# Altium PCB MB1137.PcbDoc (part 3 of 4)
Units mm, origin at the board's own origin, x right, y up, seen from the top; angles counter-clockwise.
Board outline 70.13 x 133.47 mm, 6 copper layers (Top Layer, GND, Signal, PWR, GND (Mid2), Bottom Layer), stack 1.893 mm thick; 293 components, 281 nets, 1134 pads, 921 vias.
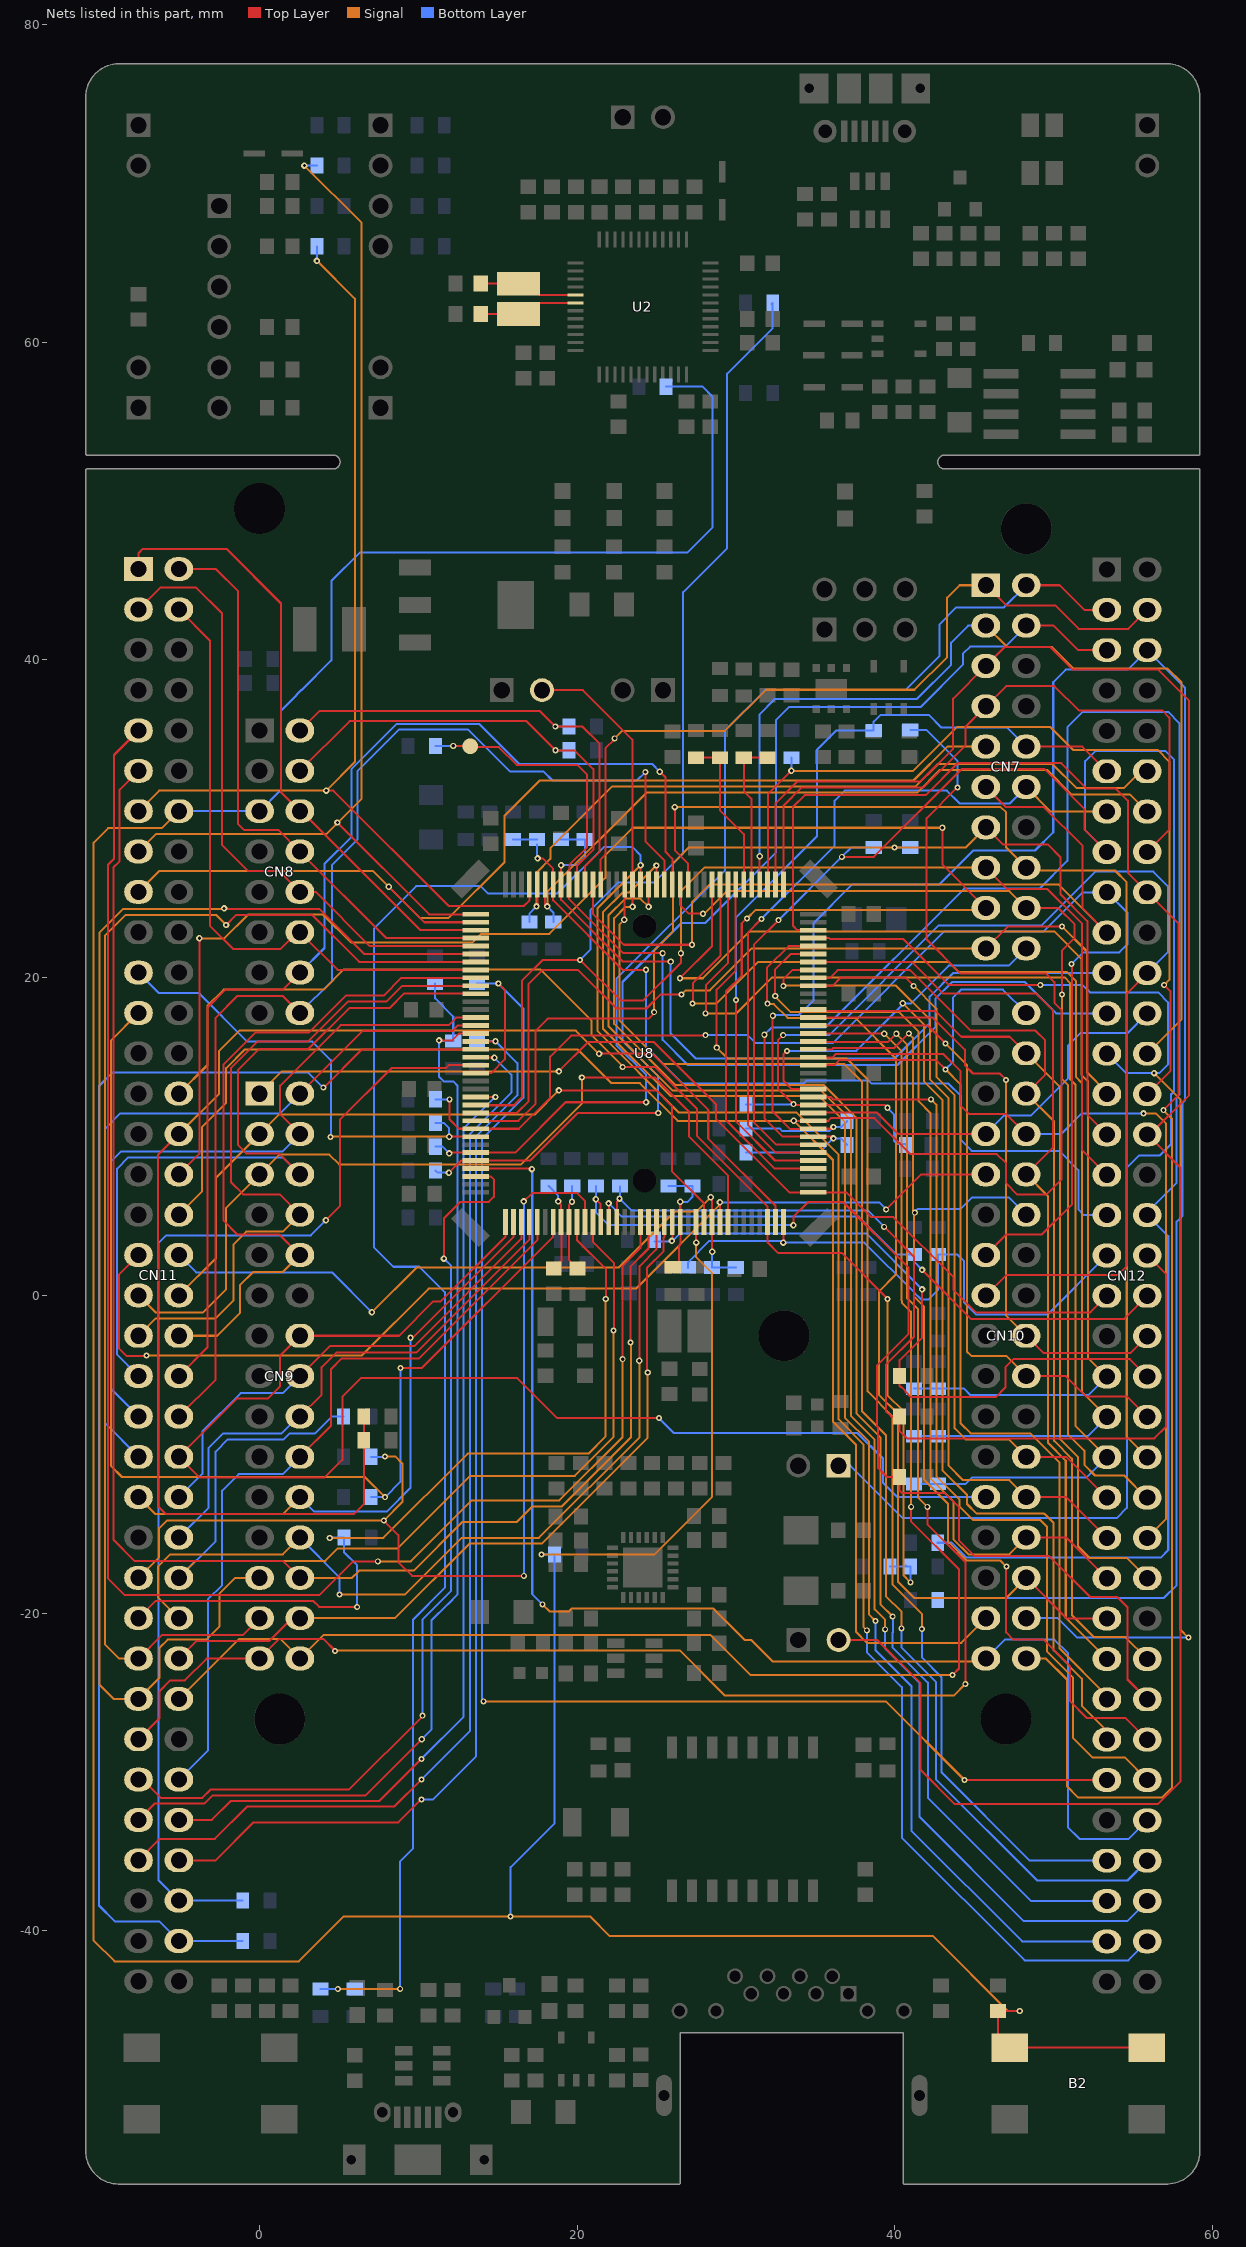
[diagram p7: the nets of this part, all layers, seen from the top]

## Via types
v1: diameter 0.406, hole 0.203, Top Layer to Bottom Layer, tented both sides, 464 vias
v2: diameter 0.381, hole 0.203, Top Layer to Bottom Layer, tented both sides, 415 vias
v3: diameter 0.508, hole 0.305, Top Layer to Bottom Layer, tented both sides, 39 vias
v4: diameter 0.66, hole 0.33, Top Layer to Bottom Layer, tented both sides, 2 vias
v5: diameter 0.381, hole 0.203, Top Layer to Bottom Layer, 1 vias

## Nets (pads, with @x,y where several pads share a name; then routed paths per layer and width w, separated by ;. In a path a pad name is that pad's centre, name@x,y a point inside that pad or via, vN(x,y) a via of type N, cw(c..) or ccw(c..) an arc to the next point about the centre after c; other vN are vias at no path point) (continued)
NRST: B2.2 B2.3 C53.2 CN8.5 CN11.14 SB111.2 SB177.1 U8.25 | length 263.3
  Top Layer w0.127: v1@27.482,3.404 U8.25@27.482,4.615 ; v1(47.854,-45.047) C53.2@46.482,-45.047 46.482,-46.627 B2.2@47.212,-47.356 B2.3@55.862,-47.356
  Signal w0.127: CN11.14@-5.08,30.48 -6.148,29.412 -9.526,29.412 -10.439,28.499 -10.439,-40.615 -9.129,-41.925 2.474,-41.925 5.309,-39.091 v2(15.799,-39.091) 20.799,-39.091 22.049,-40.341 42.398,-40.341 47.104,-45.047 v1(47.854,-45.047) ; v2(17.755,-16.307) 24.872,-16.307 28.473,-12.705 28.473,1.42 27.482,2.412 v1@27.482,3.404
  Bottom Layer w0.127: CN11.14@-5.08,30.48 CN8.5@0,30.48 1.35,31.83 1.35,36.809 2.327,37.785 2.327,37.822 2.615,38.11 2.652,38.11 4.521,39.98 4.521,44.971 6.312,46.761 26.924,46.761 28.499,48.336 28.499,56.587 27.885,57.201 SB111.2@25.597,57.201 ; v2(15.799,-39.091) 15.799,-35.992 18.574,-33.217 SB177.1@18.574,-16.307 v2(17.755,-16.307)
  other v1: 27.483,3.327
OSC_IN: C5.1 U2.5 X1.2 | length 6.2
  Top Layer w0.127: C5.1@13.932,63.703 X1.2@16.292,63.703 ; X1.2@16.307,63.688 16.906,63.688 17.614,62.98 U2.5@19.88,62.98
OSC_OUT: C6.1 U2.6 X1.1 | length 6.2
  Top Layer w0.127: C6.1@13.932,61.773 X1.1@16.292,61.773 ; X1.1@16.307,61.788 16.906,61.788 17.598,62.48 U2.6@19.88,62.48 U2.6@19.876,62.484
PA0: CN11.28 SB179.1 SB180.2 U8.34 | length 82.3
  Top Layer w0.127: v5(22.86,14.376) 24.901,14.376 27.541,11.736 27.541,10.029 31.982,5.589 U8.34@31.982,4.615 31.982,3.328 32.632,2.678 36.642,2.678 39.548,-0.229 v2(39.522,-0.229)
  Signal w0.127: CN11.28@-5.08,12.7 -3.277,14.503 -3.277,18.237 -2.261,19.252 4.038,19.252 5.311,20.526 17.676,20.526 20.904,17.298 20.904,16.377 22.86,14.421 v5(22.86,14.376) ; v2(39.522,-0.229) 39.522,-6.285 40.541,-7.303 40.541,-17.63 v2(40.97,-18.059)
  Bottom Layer w0.127: SB180.2@39.694,-17.069 SB179.1@40.977,-17.069 40.977,-18.053 v2(40.97,-18.059) ; SB179.1@40.665,-16.993 SB179.1@40.691,-17.018
PA1: CN11.30 SB11.2 SB13.2 U8.35 | length 91
  Top Layer w0.127: CN11.30@-5.08,10.16 -6.401,8.839 -6.401,-13.259 -5.892,-13.768 5.937,-13.768 6.56,-13.144 SB13.2@6.56,-9.5 ; SB13.2@6.56,-9.119 SB11.2@6.56,-7.619 ; v1@21.37,15.24 24.683,15.24 28.245,11.678 28.245,9.864 32.482,5.627 U8.35@32.482,4.615
  Signal w0.127: CN11.30@-5.08,10.16 -2.54,12.7 -2.54,15.392 -1.27,16.662 19.906,16.662 v1@21.354,15.215
  other v1: 21.37,15.215
PA2: CN12.35 SB159.1 SB160.2 U8.36 | length 37.4
  Top Layer w0.127: v1(32.969,3.327) 32.969,3.404 32.982,3.416 U8.36@32.982,4.615
  Bottom Layer w0.127: SB160.2@26.975,1.721 SB160.2@26.975,1.772 26.975,2.083 28.321,3.429 33.021,3.429 v1@33.123,3.327 ; v1(32.969,3.327) v1@33.123,3.327 ; CN12.35@53.34,2.515 49.632,-1.194 45.091,-1.194 44.348,-0.451 44.348,2.159 43.936,2.572 SB159.1@42.697,2.572 42.697,0.33 42.113,-0.254 41.637,-0.254 41.214,0.169 41.214,0.188 38.075,3.327 v1@33.123,3.327
PA3: CN9.1 CN12.37 U8.37 | length 63.2
  Top Layer w0.127: v1(18.847,14.097) 20.701,15.951 24.823,15.951 28.727,12.047 28.727,11.108 33.366,6.469 34.836,6.469 U8.37@34.857,6.49 36.944,6.49 38.504,4.93 39.901,4.93 43.688,1.143 43.688,0.334 45.089,-1.068 48.702,-1.068 ; 48.703,-1.067 52.299,-1.067 CN12.37@53.34,-0.025
  Signal w0.127: CN9.1@0,12.7 1.397,14.097 v1(18.847,14.097)
PA4: CN7.17 CN11.32 U8.40 | length 108.9
  Top Layer w0.127: CN11.32@-5.08,7.62 -3.785,8.915 v1(-3.785,22.479) ; v2(30.683,23.724) 30.658,23.724 30.353,23.419 30.353,20.126 29.362,19.136 29.362,11.037 32.406,7.993 34.853,7.993 U8.40@34.857,7.99 ; v2(42.977,29.439) 42.977,27.127 CN7.17@45.72,24.384
  Signal w0.127: v1(-3.785,22.479) -2.21,22.479 -0.711,23.978 3.988,23.978 5.766,22.2 13.386,22.2 13.945,22.758 18.237,22.758 21.768,26.289 21.768,27.719 23.488,29.439 v2(42.977,29.439) ; v2(30.683,23.724) 31.23,24.27 45.606,24.27 CN7.17@45.72,24.384
  Bottom Layer w0.127: v2@30.658,23.724 v2(30.683,23.724)
PA5: CN7.10 CN12.11 SB119.2 U8.41 | length 52.4
  Top Layer w0.127: v2(29.997,18.593) 29.997,10.941 32.448,8.49 U8.41@34.857,8.49 ; CN7.10@48.26,34.544 51.791,34.544 CN12.11@53.34,32.995
  Bottom Layer w0.127: v2(29.997,18.593) 30.061,18.593 29.997,18.656 29.997,23.812 35.103,28.917 35.103,34.366 36.297,35.56 SB119.2@38.659,35.56 38.659,36.119 39.091,36.551 42.113,36.551 42.926,35.738 47.066,35.738 CN7.10@48.26,34.544
PA6: CN7.12 CN12.13 U8.42 | length 46.3
  Top Layer w0.127: v2(31.598,23.698) 30.734,22.835 30.734,10.743 32.487,8.99 U8.42@34.857,8.99
  Signal w0.127: CN7.12@48.26,32.004 49.809,30.455 CN12.13@53.34,30.455
  Bottom Layer w0.127: v2(31.598,23.698) 36.195,28.296 36.195,31.14 36.83,31.775 43.258,31.775 44.07,30.963 47.219,30.963 CN7.12@48.26,32.004
PA7: CN12.15 JP6.1 SB121.2 U8.43 | length 129.4
  Top Layer w0.127: v2(32.665,23.622) 31.115,22.072 31.115,10.901 32.526,9.49 U8.43@34.857,9.49 ; v2(36.653,27.61) 38.675,27.61 44.217,33.151 49.399,33.151 51.918,30.632 51.918,29.337 CN12.15@53.34,27.915
  Bottom Layer w0.127: v2(32.665,23.622) v2(36.653,27.61) 37.237,28.194 SB121.2@38.659,28.194 ; JP6.1@35.814,-10.719 JP6.1@36.449,-10.719 37.186,-10.719 40.488,-14.021 53.95,-14.021 54.6,-13.371 54.6,8.042 55.372,8.814 56.681,8.814 57.376,9.509 57.376,12.646 57.554,12.824 57.554,33.747 57.036,34.265 52.603,34.265 51.968,33.63 51.968,29.286 CN12.15@53.34,27.915
PA8: CN12.23 SB115.2 TP1.1 U8.100 | length 64.2
  Top Layer w0.127: v2(12.192,34.595) 12.217,34.569 TP1.1@13.259,34.569 ; TP1.1@13.259,34.519 TP1.1@13.259,34.569 ; TP1.1@13.259,34.696 TP1.1@13.259,34.569 ; v2(25.375,21.539) 22.883,21.539 19.482,24.941 U8.100@19.482,25.865 19.502,25.886 19.502,27.097 20.625,28.219 20.625,32.766 19.99,33.401 16.18,33.401 15.062,34.519 13.31,34.519 TP1.1@13.259,34.569
  Bottom Layer w0.127: SB115.2@11.068,34.595 v2(12.192,34.595) ; v2(25.375,21.539) 25.375,16.085 26.956,14.503 40.157,14.503 42.545,16.891 42.545,18.676 43.599,19.73 48.173,19.73 50.148,17.755 CN12.23@53.34,17.755
PA9: CN12.21 SB127.2 SB128.2 U8.101 | length 50.9
  Top Layer w0.127: v1(18.982,27.084) U8.101@18.982,25.865 18.982,24.902 22.878,21.006 v2(25.883,21.006)
  Bottom Layer w0.127: v1(18.982,27.084) 19.979,27.084 20.472,27.578 SB127.2@20.472,28.708 SB128.2@18.974,28.708 SB128.2@18.982,28.701 ; v2(25.883,21.006) 25.883,16.485 27.455,14.912 39.97,14.912 42.177,17.12 42.177,18.808 43.664,20.295 CN12.21@53.34,20.295
PA10: CN12.33 SB125.2 SB126.2 U8.102 | length 54.8
  Top Layer w0.127: v1(17.501,27.508) 17.831,27.508 18.482,26.857 U8.102@18.482,25.865 18.482,24.863 22.847,20.498 v2(24.333,20.498)
  Bottom Layer w0.127: SB125.2@15.962,28.708 SB126.2@17.475,28.708 ; v1@17.475,27.526 SB126.2@17.475,28.384 ; v2(24.333,20.498) 24.333,15.638 26.637,13.335 34.252,13.335 34.455,13.538 38.329,13.538 38.532,13.335 43.368,13.335 44.133,12.571 44.133,9.785 44.825,9.093 50.33,9.093 51.537,7.886 51.537,5.41 51.892,5.055 CN12.33@53.34,5.055
PA11: CN12.14 SB133.2 U8.103 | length 45.5
  Top Layer w0.127: U8.103@17.982,25.865 17.982,24.614 v1(18.11,24.486)
  Signal w0.127: v1(18.11,24.486) 18.11,25.4 24.359,31.648 41.402,31.648 42.825,33.072 49.58,33.072 51.106,31.546 54.789,31.546 CN12.14@55.88,30.455
  Bottom Layer w0.127: v1(18.11,24.486) 18.491,24.105 SB133.2@18.491,23.508
PA12: CN12.12 SB132.2 U8.104 | length 47.4
  Top Layer w0.127: v1(17.432,24.486) 17.482,24.536 U8.104@17.482,25.865
  Signal w0.127: v1(17.432,24.486) 17.432,26.601 18.307,27.476 18.307,28.154 22.182,32.029 41.284,32.029 42.707,33.453 49.264,33.453 49.275,33.442 49.683,33.442 49.694,33.453 49.91,33.453 51.436,31.927 54.408,31.927 55.475,32.995 CN12.12@55.88,32.995
  Bottom Layer w0.127: SB132.2@16.982,23.508 16.982,24.036 v1(17.432,24.486)
PA13: CN11.13 SB108.1 U8.105 | length 65.3
  Top Layer w0.127: v1(4.191,31.775) 4.648,31.775 11.913,24.511 16.637,24.511 16.982,24.856 U8.105@16.982,25.865
  Signal w0.127: CN11.13@-7.62,30.48 -6.325,31.775 v1(4.191,31.775) 5.994,33.579 5.994,62.738 v1(3.613,65.119)
  Bottom Layer w0.127: SB108.1@3.613,66.04 v1(3.613,65.119) v1@3.632,65.1
PA14: CN11.15 SB103.1 U8.109 | length 68.7
  Top Layer w0.127: v1@4.902,29.82 v1(4.902,29.77) 10.682,23.99 U8.109@13.607,23.99
  Signal w0.127: CN11.15@-7.62,27.94 -6.529,29.031 4.19,29.031 6.426,31.267 6.426,67.515 v1(2.821,71.12)
  Bottom Layer w0.127: v1(2.821,71.12) SB103.1@3.613,71.12
PA15: CN7.9 CN11.17 U8.110 | length 67.7
  Top Layer w0.127: v1(8.128,25.73) 10.368,23.49 U8.110@13.607,23.49
  Signal w0.127: CN11.17@-7.62,25.4 -6.299,26.721 7.137,26.721 v1(8.128,25.73) 10.109,23.749 11.887,23.749 15.418,27.28 15.418,30.201 17.628,32.41 41.165,32.41 43.299,34.544 CN7.9@45.72,34.544
PB0: CN10.31 CN11.34 SB120.1 U8.46 | length 149.1
  Top Layer w0.127: v1(33.63,10.99) U8.46@34.857,10.99 35.798,10.99 35.966,11.158 38.707,11.158 40.976,8.888 46.414,8.888 46.99,8.312 46.99,7.061 47.703,6.348 49.528,6.348 50.495,7.315 50.495,17.949 50.026,18.418 50.026,19.722 49.479,20.269 44.12,20.269 41.986,22.403 41.986,30.045 43.92,31.979 v2(43.942,31.979)
  Signal w0.127: CN11.34@-5.08,5.08 -3.61,6.55 -3.61,10.614 -2.108,12.116 -2.108,14.3 -0.927,15.481 20.032,15.481 22.153,13.36 23.943,13.36 26.313,10.99 v1(33.63,10.99) 36.096,8.524 36.096,-7.953 37.544,-9.401 37.544,-21.185 38.229,-21.869 44.171,-21.869 CN10.31@45.72,-20.32
  Bottom Layer w0.127: SB120.1@40.964,35.604 41.954,35.604 43.942,33.617 v2(43.942,31.979)
PB1: CN10.7 CN12.24 U8.47 | length 26
  Top Layer w0.127: U8.47@34.857,11.49 34.878,11.511 38.853,11.511 40.204,10.16 CN10.7@45.72,10.16
  Bottom Layer w0.127: CN10.7@45.72,10.16 46.888,11.328 48.565,11.328 50.876,13.64 50.876,15.723 51.664,16.51 54.635,16.51 CN12.24@55.88,17.755
PB2: CN10.15 CN12.22 R73.1 SB137.2 U8.48 | length 81.5
  Top Layer w0.127: 32.982,12.663 33.655,11.99 U8.48@34.857,11.99 39.343,11.99 v2(39.522,11.811) v2@39.548,11.811 ; v2@32.982,16.365 v2(32.964,16.383) 32.629,16.048 32.629,13.015 v2(33.604,12.04) ; CN10.15@45.72,0 46.99,1.27 54,1.27 54.61,1.88 54.61,19.025 CN12.22@55.88,20.295
  Bottom Layer w0.127: SB137.2@30.626,12.014 33.631,12.014 33.63,12.015 33.63,12.04 v2(33.604,12.04) ; v2(32.964,16.383) 35.851,16.383 42.76,23.293 49.226,23.293 52.603,26.67 56.261,26.67 57.175,25.756 57.175,21.59 CN12.22@55.88,20.295 ; v2(39.522,11.811) 39.951,11.382 39.951,9.706 40.132,9.525 40.653,9.525 R73.1@40.704,9.474
PB3: CN7.15 CN12.31 SB110.2 U8.133 | length 119.1
  Top Layer w0.127: U8.133@13.627,11.969 16.008,11.969 16.51,12.471 16.51,19.806 17.812,21.107 v2(20.168,21.107) 20.2,21.107 22.74,18.567 24.163,18.567 26.519,20.924 v2(26.519,21.539) ; CN7.15@45.72,26.924 47.066,25.578 49.598,25.578 51.761,23.415 51.761,9.173 CN12.31@53.34,7.595
  Signal w0.127: v2(26.519,21.539) 26.519,25.444 27.999,26.924 CN7.15@45.72,26.924
  Bottom Layer w0.127: v2(20.168,21.107) 20.82,21.76 20.82,24.249 22.555,25.984 24.816,25.984 26.663,27.831 26.663,44.265 29.439,47.041 29.439,58.024 32.302,60.887 SB110.2@32.302,62.484 SB110.2@32.233,62.414
PB4: CN7.19 CN12.27 U8.134 | length 59.9
  Top Layer w0.127: U8.134@13.607,11.49 16.205,11.49 16.942,12.227 16.942,19.609 17.831,20.498 20.04,20.498 22.479,18.059 24.359,18.059 25.248,18.948 v2(26.568,18.948) ; CN7.19@45.72,21.844 47.092,23.216 v2(50.521,23.216)
  Signal w0.127: v2(26.568,18.948) 26.822,19.202 28.34,19.202 30.982,21.844 CN7.19@45.72,21.844 ; v2(50.521,23.216) 52.088,21.648 52.088,14.044 53.34,12.792 CN12.27@53.34,12.675
  Bottom Layer w0.127: CN12.27@53.34,12.675 CN12.27@53.34,12.725
PB5: CN7.13 CN12.29 SB122.2 U8.135 | length 72.4
  Top Layer w0.127: U8.135@13.607,10.99 16.289,10.99 17.374,12.074 17.374,16.662 18.136,17.424 24.511,17.424 24.841,17.755 v2(24.841,17.831) ; CN7.13@45.72,29.464 46.812,28.372 49.64,28.372 50.419,27.593 50.419,25.256 52.114,23.561 52.114,11.36 CN12.29@53.34,10.135
  Signal w0.127: v2(24.841,17.831) 24.841,21.724 26.035,22.918 26.035,27.203 27.026,28.194 v2(39.97,28.194) 44.45,28.194 CN7.13@45.72,29.464
  Bottom Layer w0.127: v2(39.97,28.194) SB122.2@40.964,28.194
PB6: CN10.13 CN12.17 SB136.2 U8.136 | length 81.7
  Top Layer w0.127: v2(11.963,12.343) 11.963,11.074 12.548,10.49 U8.136@13.607,10.49 16.328,10.49 18.288,12.45 18.288,15.036 19.609,16.358 28.042,16.358 v2(28.067,16.383) ; CN10.13@45.72,2.54 47.015,3.835 49.251,3.835 51.13,5.715 51.13,20.829 v2(51.106,20.853)
  Signal w0.127: CN12.17@53.263,25.452 CN12.17@53.34,25.375
  Bottom Layer w0.127: SB136.2@11.068,12.344 11.962,12.344 v2(11.963,12.343) ; v2(28.067,16.383) 30.734,16.383 31.214,15.903 36.103,15.903 43.111,22.912 49.353,22.912 51.816,25.375 CN12.17@53.34,25.375 54.635,24.079 54.635,22.098 54.128,21.59 51.842,21.59 v2(51.106,20.853)
PB7: CN11.21 SB139.1 U8.137 | length 29.7
  Top Layer w0.127: v1@12.116,9.99 U8.137@13.607,9.99
  Signal w0.127: v2(4.47,9.969) 4.496,9.995 v1@11.938,9.995
  Bottom Layer w0.127: CN11.21@-7.62,20.32 -6.337,19.037 -3.823,19.037 -0.762,15.977 2.438,15.977 3.319,15.977 4.493,14.803 4.493,9.992 v2(4.47,9.969) ; SB139.1@11.074,10.846 11.615,10.846 11.717,10.744 11.938,10.523 v1(11.938,9.982)
PB8: CN7.2 CN12.3 SB138.2 U8.139 | length 71.4
  Top Layer w0.127: v1(11.938,8.941) 11.987,8.99 U8.139@13.607,8.99 16.091,8.99 19.26,12.159 v1(24.333,12.159) ; CN7.2@48.26,44.704 50.368,44.704 51.918,43.155 CN12.3@53.34,43.155
  Bottom Layer w0.127: SB138.2@11.068,9.36 11.519,9.36 v1(11.938,8.941) ; v1(24.333,12.159) 24.333,13.888 22.466,15.755 22.466,19.926 29.312,26.772 29.312,35.583 31.823,38.094 40.634,38.094 42.786,40.246 42.786,42.23 43.864,43.307 46.863,43.307 CN7.2@48.26,44.704
PB9: CN7.4 CN12.5 SB143.2 U8.140 | length 70.5
  Top Layer w0.127: v1@11.921,7.728 12.683,8.49 U8.140@13.607,8.49 17.05,8.49 20.041,11.481 v1(25.095,11.481) ; CN7.4@48.26,42.164 49.987,42.164 51.537,40.615 CN12.5@53.34,40.615
  Bottom Layer w0.127: SB143.2@11.068,7.861 11.208,7.722 v1(11.921,7.722) ; v1(25.095,11.481) 25.095,13.799 22.847,16.047 22.847,19.73 26.561,23.444 28.065,23.444 32.512,27.891 32.512,36.224 33.322,37.033 41.605,37.033 44.296,39.724 44.296,40.41 44.729,40.843 46.939,40.843 CN7.4@48.26,42.164
PB10: CN10.32 CN12.25 U8.69 | length 79.6
  Top Layer w0.127: U8.69@34.857,22.49 35.854,22.49 35.903,22.441 40.502,22.441 43.41,19.533 v2(49.149,19.533)
  Signal w0.127: v1(56.312,13.995) 57.963,12.344 57.963,-21.031 v2(58.471,-21.539)
  Bottom Layer w0.127: CN10.32@48.26,-20.32 50.241,-20.32 51.46,-21.539 v2(58.471,-21.539) ; v2(49.149,19.533) 51.816,19.533 52.273,19.075 56.56,19.075 57.201,18.435 57.201,14.554 56.642,13.995 v1(56.312,13.995) 54.559,13.995 CN12.25@53.34,15.215
PB11: CN10.34 CN12.18 U8.70 | length 113.1
  Top Layer w0.127: U8.70@34.857,22.99 33.855,22.99 33.581,23.264 33.581,30.762 34.315,31.496 41.928,31.496 43.936,33.504 50.466,33.504 52.068,31.902 53.899,31.902 54.661,31.14 54.661,26.594 CN12.18@55.88,25.375 57.861,23.393 57.861,12.624 v2(56.896,11.658)
  Signal w0.127: CN10.34@48.26,-22.86 49.505,-22.86 50.825,-24.181 50.825,-30.912 51.51,-31.597 56.821,-31.597 57.429,-30.988 57.429,11.125 v2(56.896,11.658)
PB12: CN7.7 CN12.16 U8.73 | length 42.9
  Top Layer w0.127: U8.73@32.982,25.865 32.982,30.835 34.122,31.975 41.804,31.975 44.45,34.62 44.45,35.814 CN7.7@45.72,37.084 46.99,38.354 50.038,38.354 51.587,36.805 56.845,36.805 57.277,36.373 57.277,29.312 CN12.16@55.88,27.915
PB13: CN7.5 CN12.30 JP7.2 U8.74 | length 138.2
  Top Layer w0.127: U8.74@32.482,25.865 32.482,30.986 33.844,32.349 41.603,32.349 43.663,34.408 43.663,37.567 CN7.5@45.72,39.624 46.914,40.818 49.76,40.818 51.182,39.395 56.56,39.395 58.522,37.434 58.522,12.605 56.051,10.135 CN12.30@55.88,10.135 57.963,8.052 57.963,-30.607 56.564,-32.006 52.759,-32.006 52.743,-32.022 43.757,-32.022 41.609,-29.874 41.609,-24.418 38.882,-21.692 JP7.2@36.449,-21.692
PB14: CN12.28 SB118.1 U8.75 | length 56.2
  Top Layer w0.127: U8.75@32.002,25.886 32.002,31.545 v1(33.477,33.02) ; CN12.28@55.88,12.675 57.328,14.122 57.328,19.152 v2(56.948,19.533)
  Signal w0.127: v1(33.477,33.02) 41.148,33.02 43.917,35.789 49.759,35.789 51.206,34.341 56.54,34.341 57.277,33.604 57.277,19.862 v2(56.948,19.533)
  Bottom Layer w0.127: v1(33.477,33.02) SB118.1@33.477,33.845
PB15: CN7.3 CN12.26 U8.76 | length 66.1
  Top Layer w0.127: U8.76@31.482,25.865 v1(31.482,27.646)
  Signal w0.127: CN7.3@45.72,42.164 47.066,40.818 49.86,40.818 51.206,39.472 57.15,39.472 58.039,38.583 58.039,17.374 CN12.26@55.88,15.215
  Bottom Layer w0.127: v1(31.482,27.646) 31.482,36.579 32.444,37.541 41.377,37.541 43.536,39.7 43.536,41.097 44.602,42.164 CN7.3@45.72,42.164
PC0: CN9.3 CN11.38 U8.26 | length 47.9
  Top Layer w0.127: v1(18.847,12.903) 24.968,12.903 25.959,11.913 25.959,7.809 27.982,5.786 U8.26@27.982,4.615
  Signal w0.127: CN11.38@-5.08,0 -2.743,2.337 -2.743,7.417 CN9.3@0,10.16 1.219,11.379 17.323,11.379 v1(18.847,12.903)
PC1: CN11.36 SB164.2 SB165.2 U8.27 | length 44
  Top Layer w0.127: v1@28.4,6.273 v1(28.4,6.172) 28.482,6.09 U8.27@28.482,4.615 ; U8.27@28.461,4.636 U8.27@28.482,4.615 ; v1@28.482,2.76 U8.27@28.482,4.615
  Signal w0.127: v1(7.075,-1.068) 9.9,1.758 22.611,1.758 26.122,5.269 27.496,5.269 v1(28.4,6.172)
  Bottom Layer w0.127: CN11.36@-5.08,2.54 -3.989,1.449 4.559,1.449 v1(7.075,-1.068) ; v1@28.487,2.731 28.487,1.767 SB165.2@29.986,1.767
  other v1: 28.499,2.743
PC2: CN10.9 CN11.35 U8.28 | length 67.8
  Top Layer w0.127: CN11.35@-7.62,2.54 -8.84,1.32 -8.84,-3.352 -8.382,-3.81 -7.137,-3.81 v2(-7.112,-3.785) ; U8.28@28.982,4.615 v1(28.982,5.86) ; v2(39.446,5.41) 41.656,7.62 CN10.9@45.72,7.62
  Signal w0.127: v2(-7.112,-3.785) 6.426,-3.785 10.643,0.432 23.698,0.432 28.982,5.715 v1(28.982,5.86)
  Bottom Layer w0.127: v1(28.982,5.86) 38.997,5.86 v2(39.446,5.41) ; CN10.9@45.72,7.62 CN10.9@45.916,7.62
PC3: CN9.5 CN11.37 U8.29 | length 53.7
  Top Layer w0.127: v1(20.295,13.716) 24.884,13.716 27.026,11.575 27.026,10.008 29.502,7.531 29.502,5.486
  Signal w0.127: CN11.37@-7.62,0 -6.552,-1.068 -3.557,-1.068 -2.108,0.381 -2.108,5.512 CN9.5@0,7.62 1.245,8.865 4.394,8.865 5.016,8.242 16.472,8.242 20.295,12.065 v1(20.295,13.716)
PC4: CN12.34 SB150.2 SB151.1 SB178.2 U8.44 | length 125.3
  Top Layer w0.127: v2(31.775,16.408) 31.775,11.158 32.944,9.99 U8.44@34.857,9.99 36.014,9.99 v1(36.124,9.881)
  Bottom Layer w0.127: SB150.2@30.626,8.992 35.235,8.992 v1(36.124,9.881) 36.582,9.881 SB151.1@36.989,9.474 ; v2(31.775,16.408) 32.233,16.866 35.611,16.866 44.348,25.603 49.098,25.603 50.851,27.356 50.851,35.763 51.816,36.728 57.201,36.728 57.907,36.022 57.907,12.638 57.729,12.46 57.729,7.087 55.88,5.238 CN12.34@55.88,5.055 57.201,3.734 57.201,-16.027 56.718,-16.51 44.501,-16.51 43.561,-15.57 SB178.2@42.691,-15.57
PC5: CN12.6 SB140.2 SB141.1 SB181.2 U8.45 | length 133.9
  Top Layer w0.127: v2@32.276,17.595 32.276,11.607 33.414,10.469 34.836,10.469 U8.45@34.857,10.49 36.014,10.49 v1(36.124,10.599)
  Bottom Layer w0.127: SB140.2@30.626,10.516 32.734,10.516 32.912,10.338 35.845,10.338 36.106,10.599 v1(36.124,10.599) 36.615,10.599 SB141.1@36.989,10.973 ; v2@32.334,17.653 33.934,17.653 34.874,18.593 34.874,23.444 37.287,25.857 42.771,25.857 44.92,28.006 48.814,28.006 49.963,29.155 49.963,38.609 50.749,39.395 54.661,39.395 CN12.6@55.88,40.615 58.26,38.235 58.26,12.279 58.082,12.101 58.082,4.996 57.734,4.648 57.734,-18.237 56.921,-19.05 SB181.2@42.691,-19.05
  other v2: 32.309,17.602
PC6: CN7.1 CN12.4 U8.96 | length 50.9
  Top Layer w0.127: U8.96@21.476,25.871 21.476,27.454 21.768,27.746 21.768,34.43 22.352,35.014 v2(22.352,35.065) ; CN7.1@45.72,44.704 46.99,43.434 50.089,43.434 51.562,41.961 54.686,41.961 CN12.4@55.88,43.155
  Signal w0.127: v2(22.352,35.065) 22.821,35.535 29.296,35.535 31.886,38.125 41.224,38.125 43.282,40.183 43.282,43.917 44.069,44.704 CN7.1@45.72,44.704
PC7: CN7.11 CN12.19 U8.97 | length 53.1
  Top Layer w0.127: U8.97@20.982,25.865 20.982,24.022 22.931,22.073 v2(27.215,22.073) ; CN7.11@45.72,32.004 46.986,30.738 49.374,30.738 51.816,28.296 51.816,24.359 CN12.19@53.34,22.835
  Signal w0.127: v2(27.215,22.073) 27.215,24.752 28.32,25.856 50.318,25.856 CN12.19@53.34,22.835
PC8: CN8.2 SB116.1 U8.98 | length 30.3
  Top Layer w0.127: CN8.2@2.54,35.56 3.759,36.779 17.653,36.779 v2(18.618,35.814) 20.32,35.814 21.387,34.747 21.387,27.904 20.482,26.999 U8.98@20.482,25.865
  Bottom Layer w0.127: v2(18.618,35.814) SB116.1@19.494,35.814
PC9: CN8.4 SB117.1 U8.99 | length 29.6
  Top Layer w0.127: CN8.4@2.54,33.02 5.664,36.144 16.802,36.144 v2(18.631,34.315) 19.812,34.315 21.006,33.122 21.006,28.062 19.982,27.037 U8.99@19.982,25.865
  Bottom Layer w0.127: v2(18.631,34.315) SB117.1@19.494,34.315
PC10: CN8.6 CN11.1 U8.111 | length 39.2
  Top Layer w0.127: CN11.1@-7.62,45.72 -7.62,46.711 -7.341,46.99 -2.083,46.99 1.35,43.557 1.35,31.67 CN8.6@2.54,30.48 2.641,30.48 10.131,22.99 U8.111@13.607,22.99
PC11: CN8.8 CN11.2 U8.112 | length 36.9
  Top Layer w0.127: CN11.2@-5.08,45.72 -2.743,45.72 -1.346,44.323 -1.346,29.667 -0.991,29.312 1.168,29.312 CN8.8@2.54,27.94 7.99,22.49 U8.112@13.607,22.49
PC12: CN8.10 CN11.3 U8.113 | length 39.7
  Top Layer w0.127: CN11.3@-7.62,43.18 -6.248,44.552 -3.988,44.552 -2.362,42.926 -2.362,28.346 -0.737,26.721 1.219,26.721 CN8.10@2.54,25.4 3.531,25.4 6.941,21.99 U8.113@13.607,21.99
PC13: CN11.23 SB173.1 U8.7 | length 70.7
  Top Layer w0.127: v2(8.865,-4.572) 10.219,-4.572 18.482,3.691 U8.7@18.482,4.615
  Signal w0.127: CN11.23@-7.62,17.78 -9.366,16.034 -9.366,-10.726 -8.661,-11.43 6.629,-11.43 v2(7.899,-12.7)
  Bottom Layer w0.127: SB173.1@7.004,-12.7 v2(7.899,-12.7) 8.865,-11.735 v2(8.865,-4.572)
PC14: R37.2 SB144.1 U8.8 | length 5.7
  Top Layer w0.127: R37.2@18.517,1.695 19.002,2.181 19.002,4.594 U8.8@18.982,4.615 18.982,5.706 v1@18.796,5.891
  Bottom Layer w0.127: SB144.1@18.186,6.89 18.796,6.28 v1(18.796,5.918)
PC15: R38.2 SB145.1 U8.9 | length 5.5
  Top Layer w0.127: v1(19.667,5.891) 19.482,5.706 U8.9@19.482,4.615 19.482,2.223 R38.2@20.015,1.689
  Bottom Layer w0.127: v1(19.667,5.891) SB145.1@19.667,6.878
PD0: CN9.25 CN11.57 U8.114 | length 88.8
  Top Layer w0.127: v1@-2.285,24.332 3.176,24.332 3.76,24.332 6.602,21.49 U8.114@13.607,21.49
  Signal w0.127: -8.062,24.332 -7.178,24.332 ; -8.063,24.333 -8.585,24.333 -10.072,22.847 -10.072,-24.523 -9.195,-25.4 CN11.57@-7.62,-25.4 -6.299,-24.079 -6.299,-22.174 -5.791,-21.666 -3.353,-21.666 -2.515,-20.828 -2.515,-18.751 -1.544,-17.78 CN9.25@0,-17.78 ; -7.177,24.333 -5.523,24.333 ; -5.522,24.332 -4.638,24.332 ; -4.637,24.333 -2.261,24.333 v1(-2.235,24.359)
PD1: CN9.27 CN11.55 U8.115 | length 81.4
  Top Layer w0.127: CN11.55@-7.62,-22.86 -6.148,-21.388 -1.068,-21.388 CN9.27@0,-20.32 ; v1(-2.108,23.317) -1.474,23.951 3.303,23.951 6.264,20.99 U8.115@13.607,20.99
  Signal w0.127: -8.221,23.952 -8.427,23.952 -9.719,22.661 -9.719,-21.981 -8.84,-22.86 CN11.55@-7.62,-22.86 ; -8.22,23.951 -7.02,23.951 ; -7.019,23.952 -5.681,23.952 ; -5.68,23.951 -4.48,23.951 ; -4.479,23.952 -2.743,23.952 v1(-2.108,23.317)
PD2: CN8.12 CN11.4 U8.116 | length 39.5
  Top Layer w0.127: CN11.4@-5.08,43.18 -3.124,41.224 -3.124,23.277 -1.639,21.792 1.31,21.792 2.378,22.86 CN8.12@2.54,22.86 4.91,20.49 U8.116@13.607,20.49
PD3: CN9.10 CN11.40 U8.117 | length 44.4
  Top Layer w0.127: CN9.10@2.54,2.54 1.245,3.835 -1.396,3.835 -2.285,4.724 -2.285,14.518 -0.268,16.535 3.099,16.535 5.435,18.871 7.808,18.871 8.927,19.99 U8.117@13.607,19.99
  Signal w0.127: CN11.40@-5.08,-2.54 -2.667,-2.54 -1.219,-1.092 -1.219,0.66 -0.407,1.472 1.472,1.472 CN9.10@2.54,2.54
PD4: CN9.8 CN11.39 U8.118 | length 45.3
  Top Layer w0.127: CN9.8@2.54,5.08 1.257,6.363 -1.03,6.363 -1.803,7.136 -1.803,14.306 -0.133,15.977 3.039,15.977 5.553,18.49 7.975,18.49 8.974,19.49 U8.118@13.607,19.49
  Signal w0.127: CN11.39@-7.62,-2.54 -6.529,-1.449 -2.769,-1.449 -1.651,-0.331 -1.651,3.199 -0.838,4.012 1.472,4.012 CN9.8@2.54,5.08
PD5: CN9.6 CN11.41 U8.119 | length 52.2
  Top Layer w0.127: CN9.6@2.54,7.62 1.219,8.941 -0.838,8.941 -1.372,9.474 -1.372,14.173 -0.025,15.519 3.081,15.519 5.647,18.085 8.179,18.085 9.084,18.99 U8.119@13.607,18.99
  Bottom Layer w0.127: CN11.41@-7.62,-5.08 -8.965,-3.735 -8.965,7.977 -8.254,8.688 1.472,8.688 CN9.6@2.54,7.62
PD6: CN9.4 CN11.43 U8.122 | length 47
  Top Layer w0.127: CN9.4@2.54,10.16 1.295,11.405 1.295,13.208 5.105,17.018 11.906,17.018 12.378,17.49 U8.122@13.607,17.49
  Bottom Layer w0.127: CN11.43@-7.62,-7.62 -9.346,-5.894 -9.346,8.434 -8.711,9.069 1.449,9.069 CN9.4@2.54,10.16
PD7: CN9.2 CN11.45 U8.123 | length 47.5
  Top Layer w0.127: CN9.2@2.54,12.7 6.477,16.637 12.116,16.637 12.469,16.99 U8.123@13.607,16.99
  Bottom Layer w0.127: CN11.45@-7.62,-10.16 -9.727,-8.053 -9.727,10.49 -8.762,11.455 1.295,11.455 CN9.2@2.54,12.7
PD8: SB5.2 SB7.2 U8.77 | length 9.7
  Top Layer w0.127: U8.77@30.961,25.886 30.961,31.266 30.48,31.747 SB5.2@30.48,33.846 SB7.2@31.979,33.846
PD9: SB4.1 SB6.2 U8.78 | length 10.1
  Top Layer w0.127: SB4.1@27.483,33.845 SB6.2@28.981,33.846 28.981,30.531 30.48,29.032 U8.78@30.482,25.865
PD10: CN12.65 U8.79 | length 79.3
  Top Layer w0.127: v2(28.778,15.596) 28.778,19.248 29.972,20.442 U8.79@29.972,25.855
  Signal w0.127: v2(28.778,15.596) 29.461,14.912 36.954,14.912 38.278,13.589 38.278,-6.039 39.835,-7.596 39.835,-18.194 41.688,-20.047 v2(41.688,-21.006)
  Bottom Layer w0.127: v2(41.688,-21.006) 41.688,-22.79 42.926,-24.028 42.926,-30.023 48.489,-35.585 CN12.65@53.34,-35.585
PD11: CN12.45 SB174.2 SB175.1 U8.80 | length 75.9
  Top Layer w0.127: v2(28.067,17.755) 28.092,17.78 28.092,19.533 29.482,20.922 U8.80@29.482,25.865
  Signal w0.127: v2(28.067,17.755) 30.023,17.755 32.283,20.015 50.673,20.015 51.029,19.66 51.029,13.606 51.359,13.276 51.359,-8.204 CN12.45@53.34,-10.185
  Bottom Layer w0.127: 41.707,-11.862 44.45,-11.862 44.856,-11.455 52.07,-11.455 CN12.45@53.34,-10.185
PD12: CN12.43 SB171.2 SB172.1 U8.81 | length 74.3
  Top Layer w0.127: v2(27.254,18.382) 27.28,18.407 27.28,19.644 29.002,21.367 U8.81@29.002,25.844
  Signal w0.127: v2(27.254,18.382) 28.771,18.382 31.379,20.99 43.353,20.99 43.974,20.368 50.819,20.368 51.382,19.806 51.382,13.752 51.765,13.368 51.765,-6.071 CN12.43@53.34,-7.645
  Bottom Layer w0.127: 41.707,-8.865 43.205,-8.865 52.121,-8.865 CN12.43@53.34,-7.645
PD13: CN12.41 SB167.2 SB168.1 U8.82 | length 73.7
  Top Layer w0.127: v2(26.459,19.964) 28.482,21.987 U8.82@28.482,25.865
  Signal w0.127: v2(26.459,19.964) 27.904,19.964 30.852,22.912 46.162,22.912 ; 46.163,22.911 47.817,22.911 ; 47.818,22.912 50.012,22.912 51.735,21.189 51.735,13.898 52.146,13.487 52.146,-3.912 CN12.41@53.34,-5.105
  Bottom Layer w0.127: SB167.2@41.192,-5.874 43.205,-5.874 44.355,-5.874 44.755,-6.274 52.172,-6.274 CN12.41@53.34,-5.105
PD14: CN7.16 CN12.46 U8.85 | length 73.7
  Top Layer w0.127: v1@26.06,30.82 v1(26.142,30.738) 26.142,28.019 26.961,27.2 U8.85@26.961,25.886
  Signal w0.127: v1(26.142,30.738) 46.656,30.738 46.99,30.404 46.99,28.194 CN7.16@48.26,26.924 48.438,26.746 53.848,26.746 54.584,26.01 54.584,-8.889 CN12.46@55.88,-10.185
PD15: CN7.18 CN12.48 U8.86 | length 67.6
  Top Layer w0.127: U8.86@26.482,25.865 26.482,24.572 27.026,24.028 v1(27.913,24.028) ; CN7.18@48.26,24.384 50.293,24.384 51.308,23.369 51.308,22.504 50.521,21.717 v2(50.521,18.948)
  Signal w0.127: v1(27.913,24.028) 27.984,24.028 29.407,25.452 47.192,25.452 CN7.18@48.26,24.384 CN7.18@48.323,24.32 ; v2(50.521,18.948) 50.521,13.614 50.876,13.259 50.876,-8.738 51.918,-9.779 51.918,-10.668 52.588,-11.339 54.431,-11.339 55.818,-12.725 CN12.48@55.88,-12.725
PE0: CN10.33 CN12.64 U8.141 | length 83.6
  Top Layer w0.127: U8.141@13.607,7.99 17.105,7.99 v1(17.145,7.95)
  Signal w0.127: v2(17.805,-19.444) 18.259,-19.898 19.465,-19.898 19.653,-19.71 28.556,-19.71 30.538,-21.692 30.963,-21.692 32.322,-23.051 45.529,-23.051 CN10.33@45.72,-22.86
  Bottom Layer w0.127: v1(17.145,7.95) 17.17,7.95 17.166,7.945 17.166,-18.805 v2(17.805,-19.444) ; CN10.33@45.72,-22.86 46.914,-21.666 50.038,-21.666 50.876,-22.504 50.876,-33.477 51.613,-34.214 54.712,-34.214 CN12.64@55.88,-33.045
PE1: CN11.61 U8.142 | length 58.8
  Top Layer w0.127: CN11.61@-7.62,-30.48 -7.366,-30.48 -6.219,-31.627 -3.6,-31.627 -3.088,-31.115 5.627,-31.115 v2@10.262,-26.48 ; v1(11.608,2.318) 11.608,4.852 12.647,5.891 14.432,5.891 14.749,6.208 14.749,7.298 14.557,7.49 U8.142@13.607,7.49
  Bottom Layer w0.127: v2(10.262,-26.454) 10.262,-20.396 12.065,-18.593 12.065,1.861 v1(11.608,2.318) v1@11.627,2.337
PE2: CN9.14 CN10.25 CN11.46 U8.1 | length 88.6
  Top Layer w0.127: U8.1@15.482,4.615 15.482,3.701 11.399,-0.381 10.942,-0.381 8.783,-2.54 CN9.14@2.54,-2.54 1.295,-3.785 1.295,-5.715 0.533,-6.477 -1.397,-6.477 CN11.46@-5.08,-10.16 -3.785,-11.455 4.101,-11.455 5.207,-10.35 5.207,-6.375 6.375,-5.207 16.231,-5.207 18.745,-7.722 v2(25.146,-7.722)
  Bottom Layer w0.127: v2(25.146,-7.722) 26.086,-8.661 37.636,-8.661 39.243,-10.268 39.243,-11.786 40.157,-12.7 CN10.25@45.72,-12.7
PE3: CN9.22 CN11.47 U8.2 | length 38.5
  Top Layer w0.127: v2(9.5,-2.667) 9.652,-2.667 15.982,3.663 U8.2@15.982,4.615
  Signal w0.127: CN11.47@-7.62,-12.7 -6.552,-13.768 1.472,-13.768 CN9.22@2.54,-12.7
  Bottom Layer w0.127: CN9.22@2.54,-12.7 3.454,-13.614 8.001,-13.614 9.5,-12.116 v2(9.5,-2.667)
PE4: CN9.16 CN11.48 U8.3 | length 30.9
  Top Layer w0.127: CN9.16@2.54,-5.08 4.42,-3.2 9.727,-3.2 16.482,3.554 U8.3@16.482,4.615
  Bottom Layer w0.127: CN11.48@-5.08,-12.7 -3.607,-11.227 -3.607,-8.561 -1.194,-6.148 1.472,-6.148 CN9.16@2.54,-5.08
PE5: CN9.18 CN11.50 U8.4 | length 34.1
  Top Layer w0.127: CN9.18@2.54,-7.62 3.912,-6.248 3.912,-4.521 4.851,-3.581 9.885,-3.581 16.982,3.515 U8.4@16.982,4.615
  Bottom Layer w0.127: CN11.50@-5.08,-15.24 -3.2,-13.36 -3.2,-9.602 -2.286,-8.688 1.394,-8.688 2.461,-7.62 CN9.18@2.54,-7.62
PE6: CN9.20 CN11.62 U8.5 | length 48.9
  Top Layer w0.127: CN9.20@2.54,-10.16 4.496,-8.204 4.496,-4.648 5.182,-3.962 10.043,-3.962 17.482,3.476 U8.5@17.482,4.615
  Bottom Layer w0.127: CN11.62@-5.08,-30.48 -3.251,-28.651 -3.251,-19.126 -2.362,-18.237 -2.362,-12.294 -1.32,-11.251 1.449,-11.251 CN9.20@2.54,-10.16
PE7: CN10.20 CN12.44 U8.58 | length 41.8
  Top Layer w0.127: U8.58@34.857,16.99 42.052,16.99 v2@43.186,15.856 ; CN10.20@48.26,-5.08 50.749,-5.08 52.019,-6.35 54.585,-6.35 CN12.44@55.88,-7.645
  Signal w0.127: v2(43.18,15.85) 43.193,15.85 44.526,14.516 44.526,-3.531 44.806,-3.81 46.99,-3.81 CN10.20@48.26,-5.08
PE8: CN10.18 CN12.40 U8.59 | length 39.5
  Top Layer w0.127: U8.59@34.857,17.49 42.378,17.49 44.399,15.469 44.399,14.478 44.909,13.968 46.598,13.968 46.99,13.576 v2(46.99,13.564) ; CN10.18@48.26,-2.54 49.353,-3.633 54.812,-3.633 CN12.40@55.88,-2.565
  Signal w0.127: v2(46.99,13.564) 46.99,-1.27 CN10.18@48.26,-2.54
PE9: CN10.4 CN12.52 U8.60 | length 52.1
  Top Layer w0.127: U8.60@34.857,17.99 34.937,17.91 42.545,17.91 44.173,16.281 47.219,16.281 CN10.4@48.26,15.24
  Signal w0.127: CN10.4@48.26,15.24 50.394,13.106 50.394,-9.042 51.511,-10.16 51.511,-15.773 52.273,-16.535 54.61,-16.535 CN12.52@55.88,-17.805
PE10: CN10.24 CN12.47 U8.63 | length 47.1
  Top Layer w0.127: U8.63@34.857,19.49 36.076,19.49 36.601,20.015 40.64,20.015 v2(41.173,19.482) ; CN10.24@48.26,-10.16 50.775,-10.16 CN12.47@53.34,-12.725
  Signal w0.127: v2(41.173,19.482) 42.598,18.057 42.598,13.752 43.752,12.598 43.752,-8.369 44.451,-9.069 46.32,-9.069 ; 46.321,-9.068 47.168,-9.068 CN10.24@48.26,-10.16
PE11: CN10.6 CN12.56 U8.64 | length 60.4
  Top Layer w0.127: U8.64@34.857,19.99 35.916,19.99 36.395,20.469 40.95,20.469 44.757,16.662 48.844,16.662 49.454,16.053 49.454,13.894 CN10.6@48.26,12.7
  Signal w0.127: CN10.6@48.26,12.7 50.013,10.947 50.013,-9.161 51.13,-10.278 51.13,-20.117 52.526,-21.513 54.508,-21.513 CN12.56@55.88,-22.885
PE12: CN10.26 CN12.49 U8.65 | length 53.1
  Top Layer w0.127: v2(32.969,19.482) 32.969,19.908 33.551,20.49 U8.65@34.857,20.49 ; CN10.26@48.26,-12.7 50.775,-12.7 CN12.49@53.34,-15.265
  Signal w0.127: v2@32.995,19.507 40.056,19.507 42.189,17.374 42.189,13.602 43.37,12.421 43.37,-10.721 44.282,-11.632 47.192,-11.632 CN10.26@48.26,-12.7
PE13: CN10.10 CN12.55 U8.66 | length 60
  Top Layer w0.127: U8.66@34.857,20.99 41.059,20.99 43.05,18.999 48.895,18.999 49.936,17.958 49.936,9.296 CN10.10@48.26,7.62
  Signal w0.127: CN10.10@48.26,7.62 49.632,6.248 49.632,-9.279 50.749,-10.397 50.749,-20.295 CN12.55@53.34,-22.885
PE14: CN10.28 CN12.51 U8.67 | length 58.8
  Top Layer w0.127: v2(32.461,18.841) 32.461,20.524 33.427,21.49 U8.67@34.857,21.49 ; CN10.28@48.26,-15.24 50.775,-15.24 CN12.51@53.34,-17.805
  Signal w0.127: v2@32.461,18.793 33.408,17.847 40.243,17.847 41.483,16.607 41.483,12.225 42.227,11.481 42.227,-11.517 43.696,-12.985 43.696,-15.375 44.629,-16.308 47.192,-16.308 CN10.28@48.26,-15.24
PE15: CN10.30 CN12.53 U8.68 | length 64.3
  Top Layer w0.127: v2(31.971,18.364) 31.953,18.382 31.953,20.644 33.299,21.99 U8.68@34.857,21.99 ; CN10.30@48.26,-17.78 50.825,-20.345 CN12.53@53.34,-20.345
  Signal w0.127: v2@32.002,18.333 32.372,18.333 33.24,17.466 37.5,17.466 40.063,14.902 40.063,1.319 38.984,0.24 38.984,-6.246 40.188,-7.45 40.188,-18.039 41.199,-19.05 46.99,-19.05 CN10.30@48.26,-17.78
PF0: CN11.53 SB176.2 U8.10 | length 54.2
  Top Layer w0.127: CN11.53@-7.62,-20.32 -6.529,-19.229 3.365,-19.229 3.746,-19.609 v2(6.147,-19.609) ; U8.10@19.982,4.615 19.982,3.48 21.793,1.668 v2(21.793,-0.229)
  Signal w0.127: v2(4.42,-15.265) 7.791,-15.265 13.1,-9.957 20.708,-9.957 21.768,-8.897 v2@21.768,-0.254
  Bottom Layer w0.127: v2(4.42,-15.265) 4.445,-15.24 SB176.2@5.315,-15.24 5.315,-16.161 6.121,-16.967 6.121,-19.583 v2(6.147,-19.609)
PF1: CN11.51 SB170.2 U8.11 | length 64.7
  Top Layer w0.127: v2(7.824,-14.172) 8.738,-15.086 8.738,-16.789 9.601,-17.653 v2(16.637,-17.653) ; v1(16.637,5.918) 17.158,6.439 19.994,6.439 20.482,5.952 U8.11@20.482,4.615
  Signal w0.127: CN11.51@-7.62,-17.78 -6.325,-16.485 -6.325,-14.657 -5.841,-14.172 v2(7.824,-14.172) 8.998,-12.999 8.998,-10.598 8.534,-10.135 v2(7.899,-10.135)
  Bottom Layer w0.127: SB170.2@7.004,-10.16 v2@7.874,-10.16 ; v2(16.637,-17.653) v1(16.637,5.918)
PF2: CN11.52 SB169.2 U8.12 | length 63
  Top Layer w0.127: U8.12@20.982,4.615 20.982,3.369 22.301,2.049 v2@22.301,-2.184
  Signal w0.127: CN11.52@-5.08,-17.78 -4.012,-16.712 4.141,-16.712 4.928,-15.926 8.687,-15.926 13.259,-11.354 19.85,-11.354 22.276,-8.928 v2(22.276,-2.21)
  Bottom Layer w0.127: CN11.52@-5.08,-17.78 -2.769,-15.469 -2.769,-9.831 -2.007,-9.069 1.512,-9.069 1.893,-8.687 2.097,-8.687 ; 2.098,-8.688 3.504,-8.688 4.572,-7.62 SB169.2@5.29,-7.62
PF3: CN12.58 SB15.1 SB146.2 U8.13 | length 66.7
  Top Layer w0.127: v1(21.173,6.048) 21.45,5.771 21.45,4.646 U8.13@21.482,4.615 ; v1(33.604,4.42) 33.604,4.953 34.531,5.88 36.728,5.88 40.843,1.765 40.843,-2.445 38.865,-4.423 38.865,-8.225 38.928,-8.289 38.928,-10.861 39.497,-11.43 SB15.1@40.291,-11.43 40.291,-12.288 40.449,-12.446 43.129,-12.446 44.033,-13.349 44.033,-15.432 45.009,-16.408 49.708,-16.408 52.273,-18.974 53.975,-18.974 54.635,-19.634 54.635,-24.181 CN12.58@55.88,-25.425
  Bottom Layer w0.127: SB146.2@21.184,6.89 21.184,5.207 21.971,4.42 v1(33.604,4.42)
PF4: CN12.38 SB158.1 U8.14 | length 39
  Top Layer w0.127: U8.14@21.982,4.615 v1@21.982,5.791 ; v1(41.707,1.6) 44.779,-1.472 54.433,-1.472 CN12.38@55.88,-0.025
  Bottom Layer w0.127: v1(21.971,5.791) 22.809,4.953 37.719,4.953 40.1,2.572 SB158.1@41.199,2.572 41.199,2.108 v1(41.707,1.6)
PF5: CN12.36 SB14.1 SB147.2 U8.15 | length 63.3
  Top Layer w0.127: U8.15@22.492,4.625 22.492,5.88 22.682,6.071 v1(22.657,6.096) ; v2(39.319,4.318) 41.196,2.441 41.196,-2.591 39.421,-4.366 39.421,-7.29 39.751,-7.62 SB14.1@40.291,-7.62 40.291,-8.541 40.754,-9.004 56.325,-9.004 57.074,-8.255 57.074,1.321 CN12.36@55.88,2.515
  Bottom Layer w0.127: v1(22.657,6.096) v1@22.682,6.071 ; SB147.2@22.682,6.845 v1@22.682,6.071 ; v2(39.319,4.318) 38.303,5.334 23.419,5.334 v1@22.682,6.071
PF6: CN11.9 U8.18 | length 105.1
  Top Layer w0.127: CN11.9@-7.62,35.56 -9.163,34.017 -9.163,27.477 -9.546,27.093 -9.546,-17.81 -8.508,-18.848 3.784,-18.848 5.893,-16.739 v2(7.442,-16.739) ; v2@22.835,-3.988 22.835,1.842 23.982,2.989 U8.18@23.982,4.615
  Signal w0.127: v2(7.442,-16.739) 9.525,-16.739 13.36,-12.903 18.872,-12.903 22.86,-8.915 v2(22.86,-4.013)
PF7: CN9.26 CN11.11 U8.19 | length 100.3
  Top Layer w0.127: CN11.11@-7.62,33.02 -8.81,31.83 -8.81,27.33 -9.193,26.947 -9.193,-15.395 -7.875,-16.712 1.472,-16.712 CN9.26@2.54,-17.78 ; v2(23.343,-2.972) 23.343,1.811 24.482,2.95 U8.19@24.482,4.615
  Signal w0.127: CN9.26@2.54,-17.78 5.817,-17.78 6.274,-17.323 9.703,-17.323 12.776,-14.249 16.205,-14.249 17.165,-13.29 19.025,-13.29 23.368,-8.946 v2@23.368,-2.997
PF8: CN9.24 CN11.54 U8.20 | length 55.2
  Top Layer w0.127: v2(23.901,-4.115) 23.927,-4.115 23.927,1.848 24.982,2.902 U8.20@24.982,4.615
  Signal w0.127: CN11.54@-5.08,-20.238 CN11.54@-5.08,-20.32 -6.401,-18.999 -6.401,-17.094 -5.614,-16.308 1.472,-16.308 CN9.24@2.54,-15.24 ; v2(5.029,-18.821) 9.169,-18.821 12.725,-15.265 17.588,-15.265 23.927,-8.926 23.927,-4.115 v2(23.901,-4.115)
  Bottom Layer w0.127: CN9.24@2.54,-15.24 5.029,-17.729 v2(5.029,-18.821)
PF9: CN9.28 CN11.56 U8.21 | length 49.3
  Top Layer w0.127: CN11.56@-5.08,-22.86 -3.989,-21.769 0.592,-21.769 1.917,-20.443 2.417,-20.443 CN9.28@2.54,-20.32 ; v2(24.435,-4.851) 24.387,-4.803 24.387,1.73 25.438,2.781 25.438,3.645 25.482,3.688 U8.21@25.482,4.615
  Signal w0.127: CN9.28@2.54,-20.32 8.515,-20.32 13.214,-15.621 17.771,-15.621 24.435,-8.957 v2(24.435,-4.851)
PF10: CN12.42 SB10.1 SB157.2 U8.22 | length 44.5
  Top Layer w0.127: v1@25.982,3.404 U8.22@25.982,4.615 ; v1(41.707,0.373) 41.707,-2.657 40.291,-4.073 SB10.1@40.291,-5.08 40.291,-5.688 40.358,-5.756 40.387,-5.756 40.676,-6.044 40.676,-6.073 41.003,-6.401 46.33,-6.401 46.965,-5.766 46.965,-4.496 47.448,-4.012 48.702,-4.012 48.704,-4.014 54.789,-4.014 CN12.42@55.88,-5.105
  Bottom Layer w0.127: SB157.2@24.86,3.404 25.982,3.404 26.477,3.899 38.181,3.899 v1(41.707,0.373)
  other v1: 25.959,3.429
PF11: CN12.62 U8.49 | length 59.7
  Top Layer w0.127: U8.49@34.857,12.49 35.959,12.49 36.106,12.343 42.244,12.343 42.266,12.322 v2(42.266,12.343)
  Signal w0.127: v2(42.266,12.343) 42.598,12.01 42.598,-11.388 44.049,-12.838 44.049,-13.28 44.917,-14.149 49.158,-14.149 49.555,-14.546 49.555,-22.411 51.219,-24.075 51.219,-27.877 52.426,-29.083 54.458,-29.083 CN12.62@55.88,-30.505
PF12: CN7.20 CN12.59 U8.50 | length 76.1
  Top Layer w0.127: v2(33.203,15.392) 32.982,15.171 32.982,13.5 33.492,12.99 U8.50@34.857,12.99
  Signal w0.127: v2@40.419,18.39 v2(40.488,18.39) 41.836,17.041 41.836,13.455 43.004,12.288 43.004,-11.025 44.53,-12.552 44.53,-13.131 45.141,-13.741 49.367,-13.741 49.377,-13.752 49.413,-13.752 49.987,-14.326 49.987,-22.344 51.765,-24.122 51.765,-25.83 53.34,-27.405 CN12.59@53.34,-27.965
  Bottom Layer w0.127: v2(33.203,15.392) 37.568,15.392 v2@40.565,18.39 ; v2(40.488,18.39) v2@40.565,18.39 ; CN7.20@48.26,21.844 47.168,20.752 43.383,20.752 41.021,18.39 v2@40.565,18.39
PF13: CN10.2 CN12.57 U8.53 | length 64.9
  Top Layer w0.127: U8.53@34.857,14.49 36.167,14.49 36.49,14.813 42.591,14.813 v2(43.18,14.224)
  Signal w0.127: v2(43.18,14.224) 44.133,13.271 44.133,-8.064 44.756,-8.688 46.162,-8.688 ; 46.163,-8.687 47.792,-8.687 ; 47.792,-8.688 48.515,-8.688 50.368,-10.541 50.368,-22.226 53.34,-25.197 CN12.57@53.34,-25.425
  Bottom Layer w0.127: v2(43.18,14.224) 43.664,14.708 43.664,18.762 44.155,19.253 46.787,19.253 CN10.2@48.26,17.78
PF14: CN10.8 CN12.50 U8.54 | length 53.1
  Top Layer w0.127: U8.54@34.857,14.99 36.077,14.99 36.281,15.194 43.048,15.194 44.133,14.11 44.133,11.951 44.679,11.405 47.015,11.405 CN10.8@48.26,10.16
  Signal w0.127: v1(55.642,11.455) 56.413,11.455 57.07,10.799 57.07,10.342 57.074,10.338 57.074,-14.072 CN12.50@55.88,-15.265
  Bottom Layer w0.127: CN10.8@48.26,10.16 50.47,10.16 51.765,11.455 v1(55.642,11.455) v1@55.677,11.49
PF15: CN10.12 CN12.60 U8.55 | length 68.9
  Top Layer w0.127: U8.55@34.857,15.49 36.038,15.49 36.123,15.575 39.951,15.575 40.866,16.49 v2(40.869,16.49) ; v2(47.015,-17.069) 46.99,-17.094 46.99,-21.209 47.447,-21.666 49.352,-21.666 51.003,-23.317 51.003,-25.527 52.086,-26.61 54.525,-26.61 CN12.60@55.88,-27.965
  Signal w0.127: v2(40.869,16.49) 41.13,16.228 41.13,5.326 v2(41.25,5.207) ; v2@41.186,5.207 41.186,-0.058 41.834,-0.706 41.834,-11.622 43.343,-13.131 43.343,-15.521 44.51,-16.689 46.635,-16.689 v2(47.015,-17.069)
  Bottom Layer w0.127: v2(41.25,5.207) 41.186,5.207 41.412,5.433 44.118,5.433 44.856,6.171 47.169,6.171 CN10.12@48.26,5.08
PG0: CN9.29 CN11.59 U8.56 | length 105.6
  Top Layer w0.127: CN11.59@-7.62,-27.94 -6.299,-26.619 -6.299,-24.917 -5.613,-24.232 -4.701,-24.232 -3.329,-22.86 CN9.29@0,-22.86 1.219,-21.641 4.039,-21.641 4.75,-22.352 v2(4.75,-22.377) ; U8.56@34.885,15.961 39.573,15.961 v2(40.081,16.469) ; v2(42.037,-13.31) 42.037,-14.394 44.425,-16.782 v2(44.425,-24.46)
  Signal w0.127: v2(4.75,-22.377) 4.75,-22.352 4.752,-22.349 26.449,-22.349 29.299,-25.199 43.685,-25.199 v2(44.425,-24.46) ; v2(40.081,16.469) 40.77,15.781 40.77,-0.18 41.453,-0.864 41.453,-12.725 v2(42.037,-13.31)
PG1: CN9.30 CN11.58 U8.57 | length 99.4
  Top Layer w0.127: U8.57@34.857,16.49 v2@39.303,16.49 ; v2(41.021,-13.31) 41.021,-14.242 44.028,-17.249 44.028,-23.485 v2(43.612,-23.901)
  Signal w0.127: CN11.58@-5.08,-25.4 -5.055,-25.4 -1.27,-21.615 1.295,-21.615 CN9.30@2.54,-22.86 4.013,-21.387 28.395,-21.387 30.909,-23.901 v2(43.612,-23.901) ; v2(39.324,16.469) 40.416,15.377 40.416,-0.327 40.432,-0.342 40.432,-0.452 40.996,-1.016 40.996,-13.284 v2(41.021,-13.31)
PG2: CN8.14 CN11.42 U8.87 | length 74.1
  Top Layer w0.127: CN11.42@-5.08,-5.08 -3.277,-3.277 -3.277,18.123 -2.147,19.252 1.472,19.252 CN8.14@2.54,20.32 ; v1(25.197,32.969) 25.552,32.614 25.552,27.924 25.982,27.495 U8.87@25.982,25.865
  Bottom Layer w0.127: CN8.14@2.54,20.32 4.089,21.869 4.089,27.163 5.778,28.852 5.778,33.125 8.617,35.964 13.846,35.964 16.358,33.452 24.714,33.452 v1(25.197,32.969)
PG3: CN8.16 CN11.44 U8.88 | length 77.4
  Top Layer w0.127: CN11.44@-5.08,-7.62 -2.769,-5.309 -2.769,17.475 -1.396,18.848 1.472,18.848 CN8.16@2.54,17.78 ; v2(24.282,32.944) 24.282,28.575 25.502,27.355 U8.88@25.502,25.886
  Bottom Layer w0.127: CN8.16@2.54,17.78 4.547,19.787 4.547,27.082 6.159,28.694 6.159,33.006 8.763,35.611 13.132,35.611 15.773,32.969 17.882,32.969 18.44,32.41 23.749,32.41 v2(24.282,32.944)
PG4: CN12.69 U8.89 | length 92.3
  Top Layer w0.127: v1@24.968,27.075 v1(24.982,27.061) U8.89@24.982,25.865
  Signal w0.127: v1(24.982,27.061) 23.282,25.362 22.861,25.362 21.612,24.113 21.612,16.803 25.875,12.54 35.225,12.54 36.866,10.899 36.866,-7.724 38.367,-9.226 38.367,-20.092 v2(38.772,-20.498)
  Bottom Layer w0.127: v2(38.772,-20.498) 38.772,-22.332 41.027,-24.587 41.027,-33.687 48.006,-40.665 CN12.69@53.34,-40.665
PG5: CN12.68 U8.90 | length 92.6
  Top Layer w0.127: U8.90@24.482,25.865 24.482,24.464 v1(24.486,24.46) v1@24.486,24.366
  Signal w0.127: v1(24.486,24.46) 23.965,24.981 23.019,24.981 21.965,23.927 21.965,16.949 26.021,12.893 35.371,12.893 37.219,11.045 37.219,-7.578 38.72,-9.079 38.72,-19.767 39.38,-20.427 v2(39.38,-21.018)
  Bottom Layer w0.127: v2(39.38,-21.018) 39.38,-22.242 41.548,-24.409 41.548,-32.836 48.108,-39.395 54.61,-39.395 CN12.68@55.88,-38.125
PG6: CN12.70 SB186.1 SB187.1 U8.91 | length 191.9
  Top Layer w0.127: U8.91@23.982,25.865 v1(23.982,27.08)
  Signal w0.127: v2(4.928,-43.667) 8.834,-43.667 v2(8.852,-43.65) ; v1(23.982,27.08) 21.258,24.357 21.258,16.657 26.405,11.511 33.806,11.511 34.547,10.77 34.547,10.761 36.449,8.859 36.449,-7.807 38.014,-9.372 38.014,-20.869 v2(38.227,-21.082)
  Bottom Layer w0.127: SB187.1@3.835,-43.667 v2(4.928,-43.667) SB186.1@5.994,-43.667 ; v2(8.852,-43.65) 8.852,-35.624 9.661,-34.814 9.661,-20.4 11.659,-18.402 11.659,0.203 10.058,1.803 8.417,1.803 7.209,3.012 7.209,23.109 9.862,25.763 13.918,25.763 14.376,25.305 18.754,25.305 21.668,28.219 23.482,28.219 23.982,27.719 v1(23.982,27.08) ; v2(38.227,-21.082) 38.227,-22.454 40.437,-24.663 40.437,-34.138 48.158,-41.859 54.686,-41.859 CN12.70@55.88,-40.665
PG7: CN12.67 JP4.2 U8.92 | length 102
  Top Layer w0.127: JP4.2@17.78,38.1 20.344,38.1 23.461,34.983 23.461,25.886 U8.92@23.482,25.865 v1(23.482,24.46)
  Signal w0.127: v1(23.482,24.46) 23.037,24.46 22.318,23.741 22.318,17.096 26.167,13.246 35.517,13.246 37.572,11.192 37.572,-7.432 39.073,-8.933 39.073,-19.435 v2(39.853,-20.214)
  Bottom Layer w0.127: v2(39.853,-20.214) 39.86,-20.222 39.86,-21.217 39.853,-21.224 39.853,-22.168 42.069,-24.384 42.069,-31.63 48.564,-38.125 CN12.67@53.34,-38.125
PG8: CN12.66 U8.93 | length 87.9
  Top Layer w0.127: U8.93@22.961,25.844 v1(22.961,23.648) v1@23.012,23.597
  Signal w0.127: v1(22.961,23.648) 22.671,23.358 22.671,17.301 25.412,14.559 36.808,14.559 37.925,13.443 37.925,-7.285 39.426,-8.787 39.426,-18.937 40.416,-19.927 v2(40.416,-20.955)
  Bottom Layer w0.127: v2(40.416,-20.955) 40.416,-22.177 42.573,-24.333 42.573,-30.457 48.946,-36.83 54.635,-36.83 CN12.66@55.88,-35.585
PG9: CN11.63 SB130.1 SB134.1 U8.124 | length 73.2
  Top Layer w0.127: CN11.63@-7.62,-33.02 -6.58,-31.98 -3.454,-31.98 -2.941,-31.468 6.683,-31.468 v2(10.211,-27.94) ; v1(11.303,16.053) 12.141,16.053 12.578,16.49 U8.124@13.607,16.49
  Bottom Layer w0.127: v2(10.211,-27.94) 10.82,-27.33 10.82,-20.465 11.855,-19.431 11.862,-19.431 12.471,-18.821 12.471,13.183 12.184,13.47 11.581,13.47 11.303,13.748 v1(11.303,16.053) 11.354,16.002 SB134.1@12.192,16.002 12.192,17.551 11.049,18.694 SB130.1@11.049,19.641
PG10: CN11.66 SB135.1 U8.125 | length 70.5
  Top Layer w0.127: CN11.66@-5.08,-35.56 -2.769,-35.56 -0.381,-33.172 8.738,-33.172 v2(10.185,-31.725) ; U8.125@13.607,15.99 v1@14.84,15.99
  Bottom Layer w0.127: v2(10.185,-31.725) 10.929,-31.725 13.614,-29.039 13.614,9.982 16.231,12.598 16.231,14.624 v1(14.852,16.002) SB135.1@13.691,16.002
PG11: CN11.70 SB183.1 U8.126 | length 87
  Top Layer w0.127: v2(4.013,13.081) 4.039,13.081 6.448,15.49 U8.126@13.607,15.49
  Bottom Layer w0.127: SB183.1@-1.06,-40.64 CN11.70@-5.08,-40.64 -6.312,-39.408 -9.106,-39.408 -10.109,-38.405 -10.109,13.183 -9.271,14.021 -8.545,14.021 -8.021,14.021 3.073,14.021 v2(4.013,13.081)
PG12: CN11.65 U8.127 | length 69.3
  Top Layer w0.127: CN11.65@-7.62,-35.56 -6.274,-34.214 -2.819,-34.214 -0.78,-32.174 8.491,-32.174 v2(10.185,-30.48) ; U8.127@13.607,14.99 v1@14.779,14.99
  Bottom Layer w0.127: v2(10.185,-30.48) 13.233,-27.432 13.233,10.142 15.85,12.758 15.85,13.894 v1(14.783,14.961)
PG13: CN11.68 SB182.1 U8.128 | length 73.7
  Top Layer w0.127: v1@4.166,4.724 v1(4.178,4.737) 5.055,5.613 5.055,11.049 8.306,14.3 11.715,14.3 11.905,14.49 U8.128@13.607,14.49
  Bottom Layer w0.127: SB182.1@-1.06,-38.1 CN11.68@-5.08,-38.1 -6.35,-36.83 -6.35,3.302 -5.867,3.785 3.226,3.785 v1(4.178,4.737)
PG14: CN12.61 SB131.1 U8.129 | length 96.9
  Top Layer w0.127: U8.129@13.607,13.99 14.574,13.99 15.441,14.856 15.441,19.23 v1(15.037,19.634) ; v2(44.374,-30.505) CN12.61@53.34,-30.505
  Signal w0.127: v2(14.097,-25.552) 39.421,-25.552 v2(44.374,-30.505)
  Bottom Layer w0.127: SB131.1@13.691,19.641 15.03,19.641 v1(15.037,19.634) 16.612,18.059 16.612,12.441 13.995,9.824 13.995,-25.375 14.173,-25.552 v2(14.097,-25.552)
PG15: CN11.64 U8.132 | length 61.7
  Top Layer w0.127: CN11.64@-5.08,-33.02 -2.997,-33.02 -1.798,-31.821 7.549,-31.821 v2(10.185,-29.185) ; U8.132@13.607,12.49 v1(14.845,12.49)
  Bottom Layer w0.127: v2(10.185,-29.185) 12.852,-26.518 12.852,10.517 v1@14.845,12.51
PH0: SB8.2 SB148.1 SB149.2 U8.23 | length 7.5
  Top Layer w0.127: SB8.2@25.984,1.689 26.403,2.108 26.403,3.111 26.502,3.21 26.502,4.594 U8.23@26.482,4.615 v1(26.482,5.893)
  Bottom Layer w0.127: SB148.1@25.748,6.89 SB149.2@27.247,6.89 27.247,6.194 26.945,5.893 v1(26.482,5.893) v1@26.492,5.903